# Altium PCB MY_AVR.PcbDoc
Units mm, origin at the board's own origin, x right, y up, seen from the top; angles counter-clockwise.
Board outline 35.7 x 43.97 mm, 2 copper layers (Top Layer, Bottom Layer); 31 components, 27 nets, 162 pads, 47 vias.
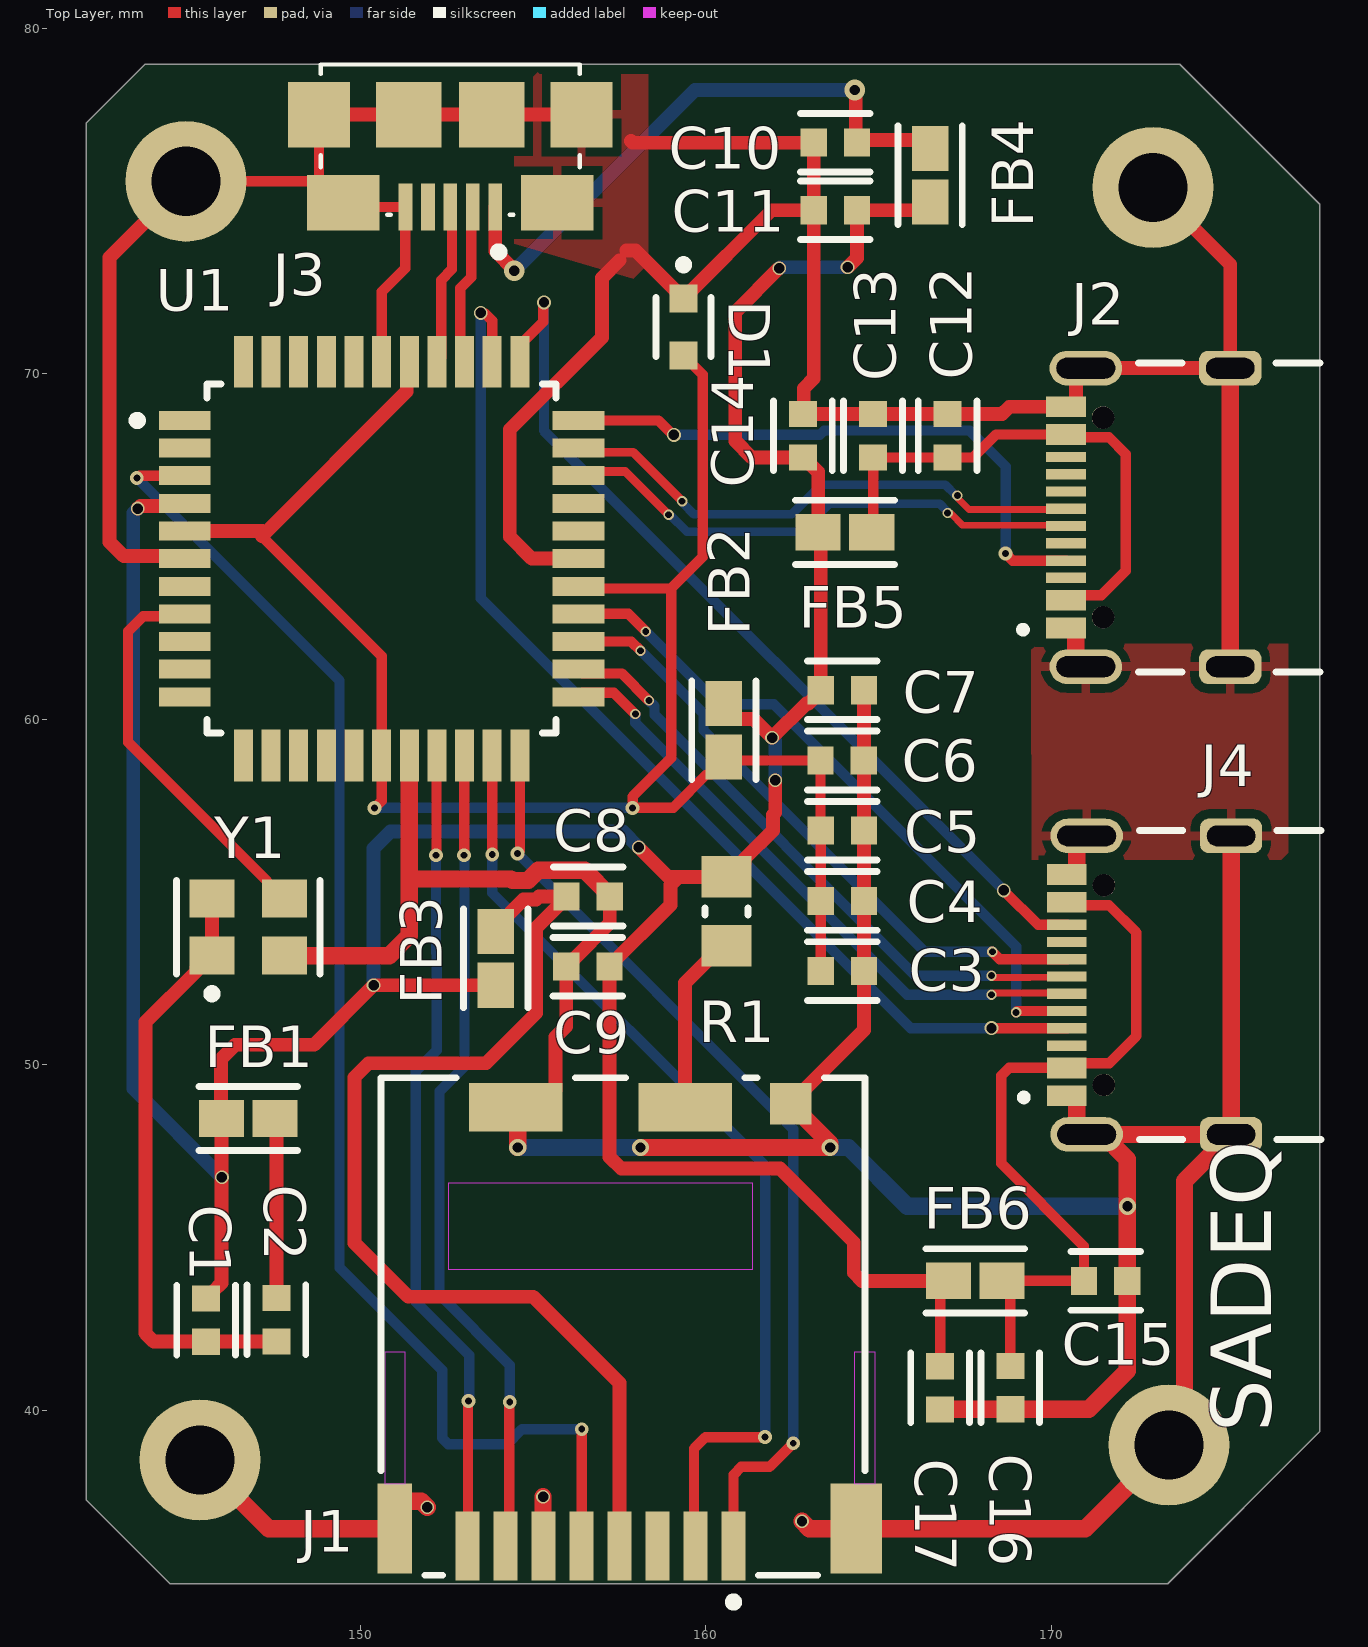
[diagram p0: Top Layer view]
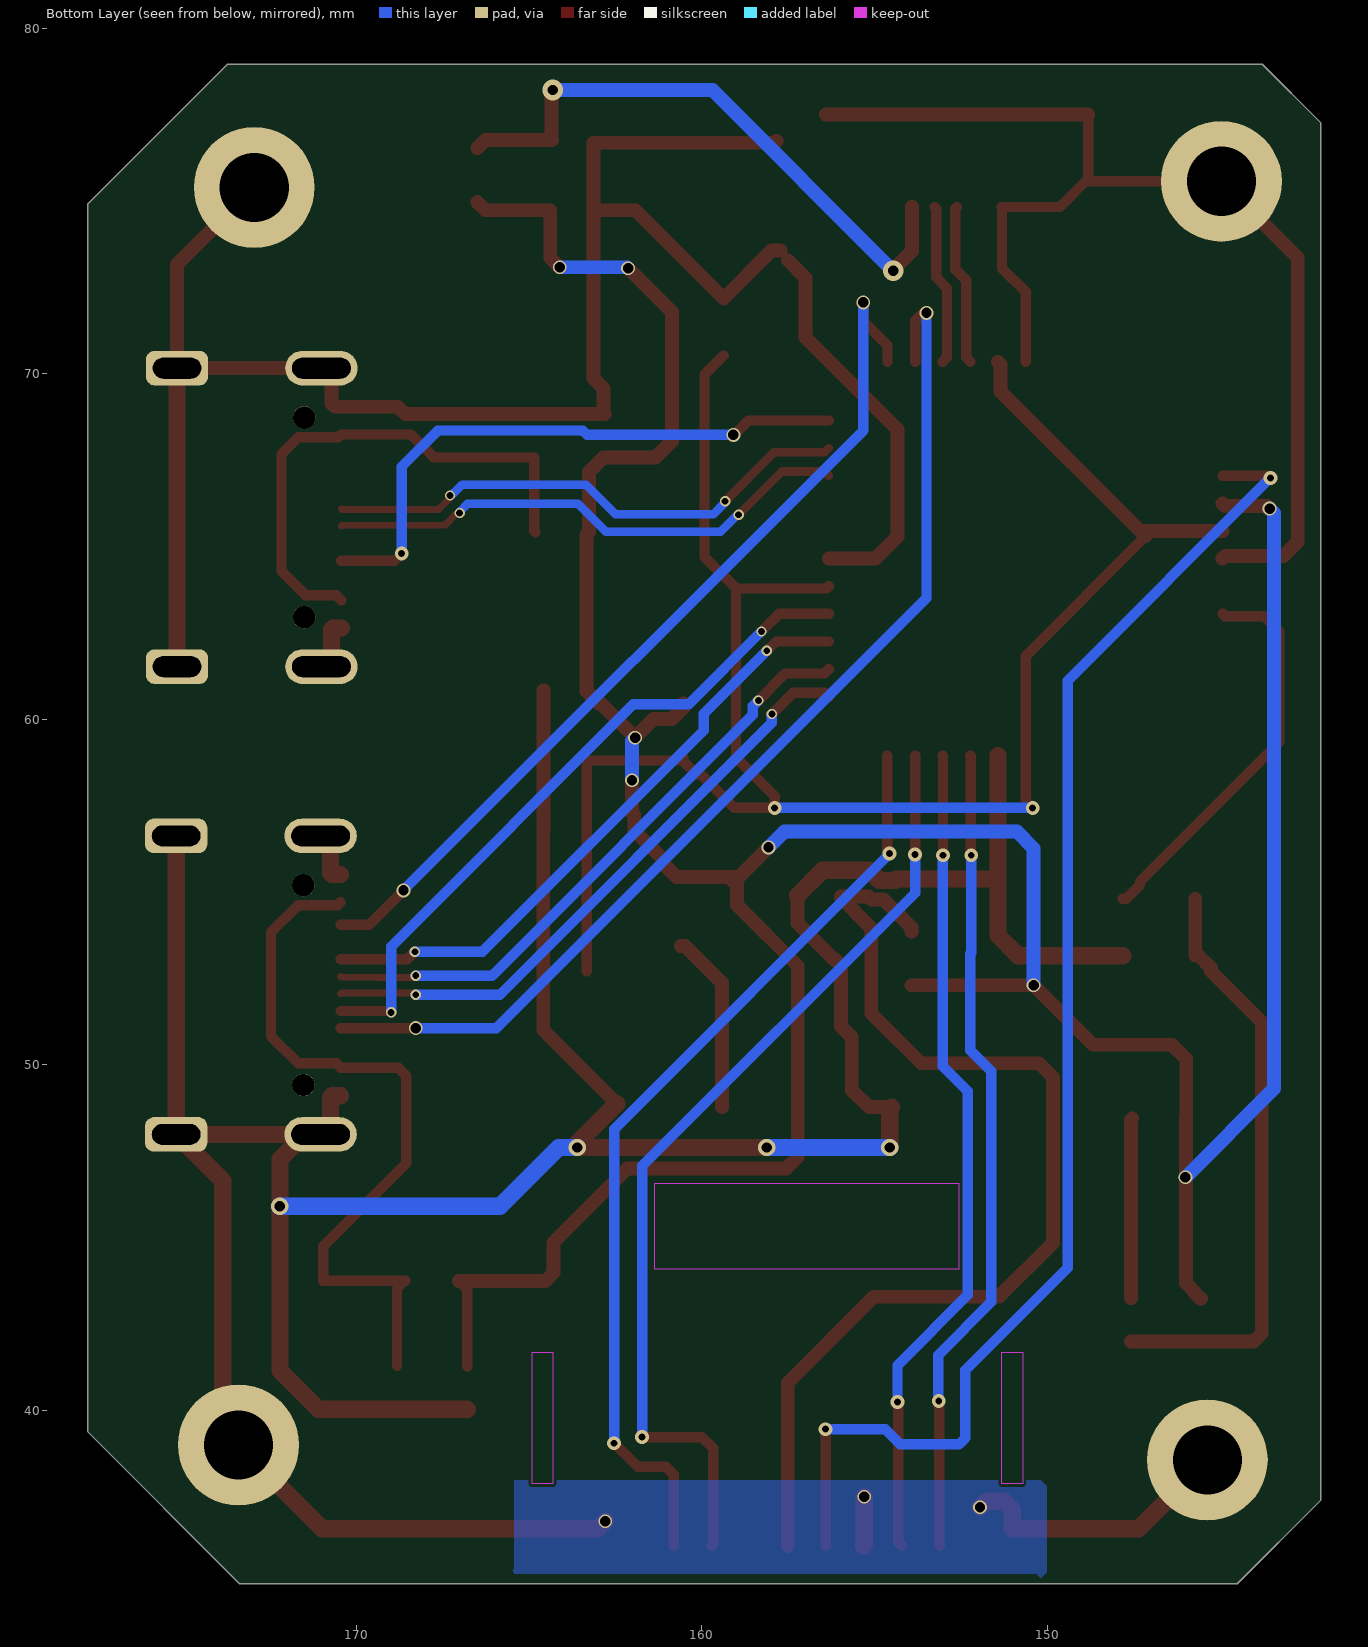
[diagram p1: Bottom Layer view, seen from below]
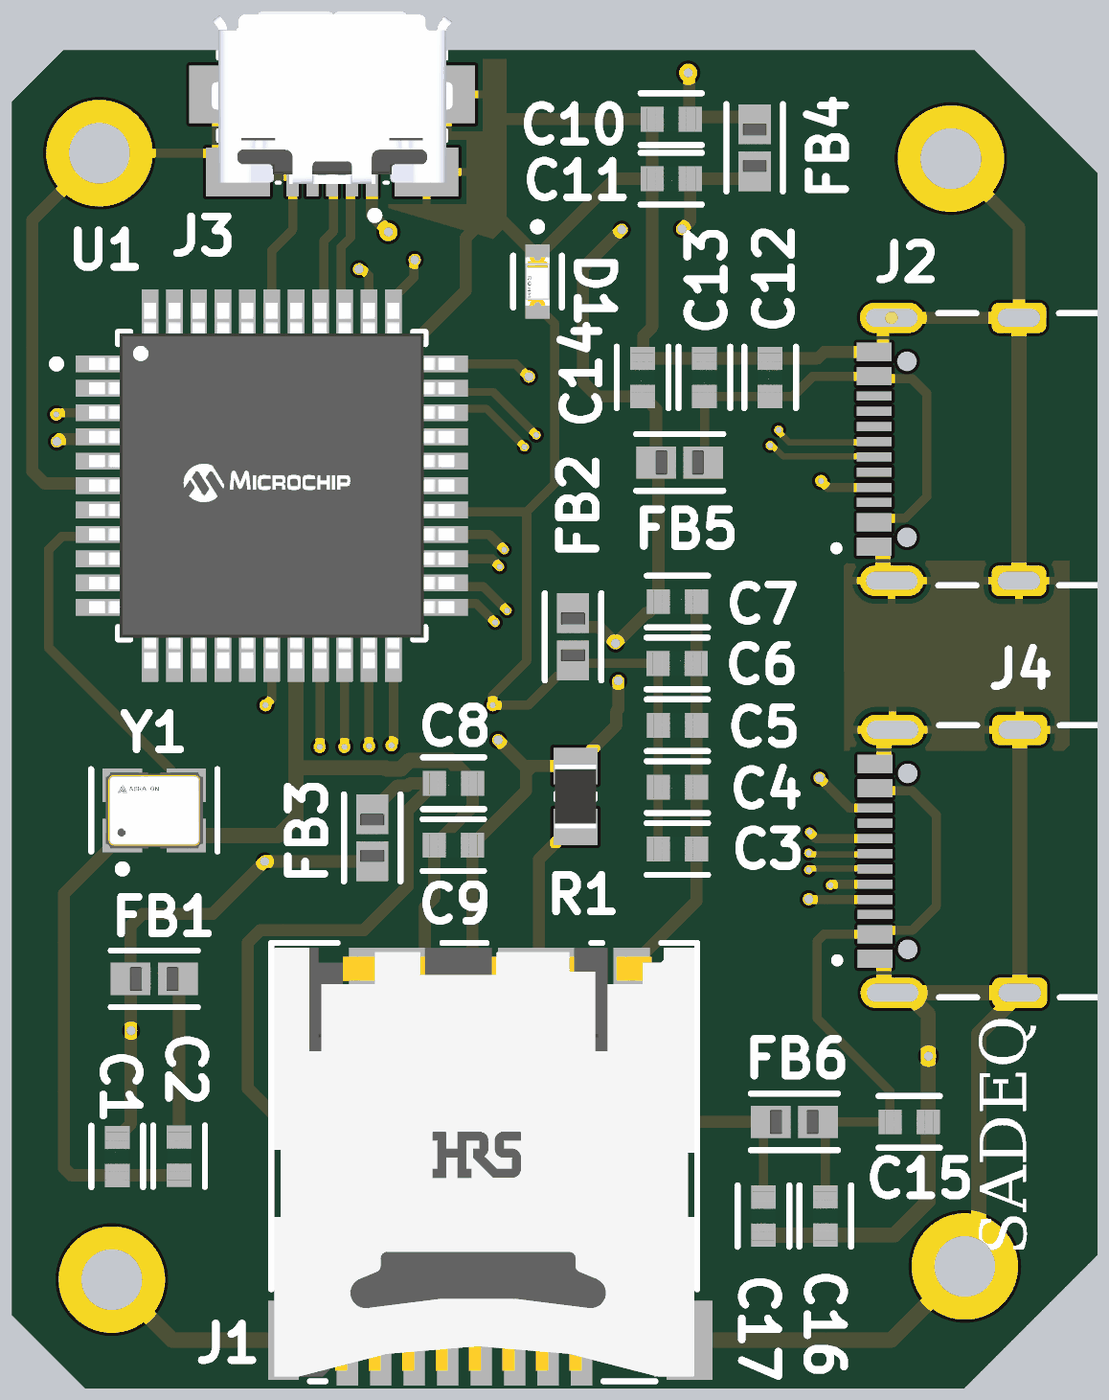
[diagram p2: 3D render of the assembled board from above, using the file's embedded part models]

## Layer stack, top to bottom
Top Solder: solder mask 0.0102, Solder Resist, Dk 3.5
Top Layer: signal copper 0.0356
Dielectric 1: dielectric 0.32, FR-4, Dk 4.8
Bottom Layer: signal copper 0.0356
Bottom Solder: solder mask 0.0102, Solder Resist, Dk 3.5

## Board outline
142.075,37.4 142.075,77.25 143.775,78.95 173.725,78.95 177.775,74.9 177.775,39.375 173.375,34.975 144.5,34.975

## Design rules (kind name [scope] priority, off if disabled: settings)
Clearance [All] p1: gap=0.1 ignorepadtopadclearanceinfootprint=TRUE except(0: Arc-Hole Track-Hole SMDPad-Hole THPad-Hole Via-Hole Fill-Hole Poly-Hole Region-Hole Text-Hole)
DiffPairsRouting [All] p1: maxlimit=0.254 minlimit=0.254 mostfreqgap=0.254 toplayer_minwidth=0.2 toplayer_maxwidth=0.4 toplayer_prefwidth=0.381 bottomlayer_minwidth=0.2 bottomlayer_maxwidth=0.4 bottomlayer_prefwidth=0.381 maxuncoupledlength=12.7
PolygonConnect [All] p1: connectstyle=Relief reliefconductorwidth=0.254 reliefentries=4 polygonreliefangle="90 Angle" airgapwidth=0.254
RoutingVias [All] p1: holewidth=0.3 width=0.6 viastyle="Through Hole" minholewidth=0.2 minwidth=0.3 maxholewidth=0.8 maxwidth=0.8
SolderMaskExpansion [All] p1: expansion=0.102 istentingtop=FALSE
Width [All] p1: maxlimit=0.5 minlimit=0.2 preferedwidth=0.3 minimp=50.000000 maximp=50.000000 favimp=50.000000
29 further rules are at their usual default settings.

## Classes and differential pairs
net class diff3: 3_N
component class MY_AVR: C1 C2 C3 C4 C5 C6 C7 C8 C9 D1 FB1 FB2 FB3 J1 R1 U1 Y1
component class CONNECTORS: C10 C11 C12 C13 C14 C15 C16 C17 FB4 FB5 FB6 J2 J3 J4
differential pair 3: +3_P -3_N
differential pair 1: +1_P -1_N
differential pair 0: +0_P -0_N

## Components (designator, comment, footprint, x,y, rotation, side; value= is the part's Value field where it differs from the comment)
C1 "100n" FP-CL10-IPC_C 145.543,42.605 r270 top
C2 "100n" FP-CL10-IPC_C 147.575,42.613 r270 top
C3 "100n" FP-CL10-IPC_C 163.957,52.705 r0 top
C4 "100n" FP-CL10-IPC_C 163.957,54.737 r0 top
C5 "100n" FP-CL10-IPC_C 163.957,56.769 r0 top
C6 "100n" FP-CL10-IPC_C 163.949,58.801 r0 top
C7 "100n" FP-CL10-IPC_C 163.957,60.833 r0 top
C8 "100n" FP-CL10-IPC_C 156.599,54.864 r0 top
C9 "100n" FP-CL10-IPC_C 156.591,52.832 r180 top
C10 "100n" FP-CL10-IPC_C 163.754,76.683 r180 top
C11 "100n" FP-CL10-IPC_C 163.754,74.727 r180 top
C12 "100n" FP-CL10-IPC_C 167.005,68.199 r90 top
C13 "100n" FP-CL10-IPC_C 164.846,68.199 r90 top
C14 "100n" FP-CL10-IPC_C 162.814,68.199 r90 top
C15 "100n" FP-CL10-IPC_C 171.577,43.739 r0 top
C16 "100n" FP-CL10-IPC_C 168.819,40.651 r270 top
C17 "100n" FP-CL10-IPC_C 166.787,40.643 r270 top
D1 "SMLE13WBC8W1" FP-SMLE13WBC8W1-MFG 159.36,71.349 r270 top
FB1 "BLM18KG121TN1D" FP-BLM18-0_15-t0_6-d1_2-IPC_A 146.761,48.438 r0 top
FB2 "BLM18KG121TN1D" FP-BLM18-0_15-t0_6-d1_2-IPC_A 160.528,59.676 r270 top
FB3 "BLM18KG121TN1D" FP-BLM18-0_15-t0_6-d1_2-IPC_A 153.924,53.072 r90 top
FB4 "BLM18KG121TN1D" FP-BLM18-0_15-t0_6-d1_2-IPC_A 166.497,75.743 r90 top
FB5 "BLM18KG121TN1D" FP-BLM18-0_15-t0_6-d1_2-IPC_A 164.033,65.405 r0 top
FB6 "BLM18KG121TN1D" FP-BLM18-0_15-t0_6-d1_2-IPC_A 167.804,43.739 r0 top
J1 "DM3CS-SF" FP-DM3CS-SF-MFG 157.607,42.418 r0 top
J2 "USB4105GFA060" GCT_USB4105GFA060#1 175.184,65.837 r90 top
J3 "10118192-0001LF" AMPHENOL_10118192-0001LF 152.609,74.82 r180 top
J4 "USB4105GFA060" GCT_USB4105GFA060#2 175.209,52.299 r90 top
R1 "1k" RESC2013X60X35ML10T20 160.604,54.432 r270 top
U1 "ATMEGA16A-AUR" FP-44A-MFG 150.622,64.643 r0 top
Y1 "ASE-24.000MHZ-LR-T" FP-ASE-MFG 146.761,53.975 r0 top

## Footprints (in the part's own frame and the unit in brackets; to place one, negate y for a bottom-side part, rotate by r counter-clockwise, add the part's x,y. Pads: shape width x height; smd on the part's side, far side on the other; paste and mask are expansions set on the pad)
AMPHENOL_10118192-0001LF [mm]
  rect 0.4x1.35 smd: 1(-1.3,0) 2(-0.65,0) 3(0,0) 4(0.65,0) 5(1.3,0)
  rect 2.1x1.6 smd: SH1(-3.1,-0.125) SH2(3.1,-0.125)
  rect 1.8x1.9 smd: SH3(-3.8,-2.675) SH6(3.8,-2.675)
  rect 1.9x1.9 smd: SH4(-1.2,-2.675) SH5(1.2,-2.675)
  silkscreen extent -3.75,-4.13 3.75,1.4, body extent -3.96,-5.4 3.96,0.27, height 2.5
FP-44A-MFG [mm]
  rect 1.5x0.55 smd paste+0 mask+0: 1(-5.7,4) 2(-5.7,3.2) 3(-5.7,2.4) 4(-5.7,1.6) 5(-5.7,0.8) 6(-5.7,0) 7(-5.7,-0.8) 8(-5.7,-1.6) 9(-5.7,-2.4) 10(-5.7,-3.2) 11(-5.7,-4) 23(5.7,-4) 24(5.7,-3.2) 25(5.7,-2.4) 26(5.7,-1.6) 27(5.7,-0.8) 28(5.7,0) 29(5.7,0.8) 30(5.7,1.6) 31(5.7,2.4) 32(5.7,3.2) 33(5.7,4)
  rect 0.55x1.5 smd paste+0 mask+0: 12(-4,-5.7) 13(-3.2,-5.7) 14(-2.4,-5.7) 15(-1.6,-5.7) 16(-0.8,-5.7) 17(0,-5.7) 18(0.8,-5.7) 19(1.6,-5.7) 20(2.4,-5.7) 21(3.2,-5.7) 22(4,-5.7) 34(4,5.7) 35(3.2,5.7) 36(2.4,5.7) 37(1.6,5.7) 38(0.8,5.7) 39(0,5.7) 40(-0.8,5.7) 41(-1.6,5.7) 42(-2.4,5.7) 43(-3.2,5.7) 44(-4,5.7)
  silkscreen extent -7.2,-5.05 5.05,5.05, body extent -6.55,-6.55 6.55,6.55, height 0.25
FP-ASE-MFG [mm]
  rect 1.3x1.1 smd paste+0 mask+0: 1(-1.05,-0.825) 2(1.05,-0.825) 3(1.05,0.825) 4(-1.05,0.825)
  silkscreen extent -2.07,-2.05 2.07,1.35, body extent -1.8,-1.48 1.8,1.48, height 0.25
FP-BLM18-0_15-t0_6-d1_2-IPC_A [mm]
  rect 1.306x1.058 smd paste+0 mask+0: 1(-0.776,0) 2(0.776,0)
  silkscreen extent -1.43,-0.93 1.43,0.93, body extent -1.93,-1.03 1.93,1.03, height 0.25
FP-CL10-IPC_C [mm]
  rect 0.758x0.812 smd paste+0 mask+0: 1(-0.627,0) 2(0.627,0)
  silkscreen extent -1.01,-0.85 1.01,0.85, body extent -1.11,-0.55 1.11,0.55, height 0.25
FP-DM3CS-SF-MFG [mm]
  rect 0.7x2 smd paste+0 mask+0: 1(3.2,-6.35) 2(2.1,-6.35) 3(1,-6.35) 4(-0.1,-6.35) 5(-1.2,-6.35) 6(-2.3,-6.35) 7(-3.4,-6.35) 8(-4.5,-6.35)
  rect 2.7x1.4 smd paste+0 mask+0: 9(-3.1,6.35) 10(1.8,6.35)
  rect 1.2x1.2 smd paste+0 mask+0: 11(4.85,6.45)
  rect 1x2.6 smd paste+0 mask+0: 12(-6.6,-5.85)
  rect 1.5x2.6 smd paste+0 mask+0: 13(6.75,-5.85)
  Keep-Out Layer region: -5.05,1.65 3.75,1.65 3.75,4.15 -5.05,4.15
  Keep-Out Layer region: 6.7,-4.55 7.3,-4.55 7.3,-0.75 6.7,-0.75
  Keep-Out Layer region: -6.9,-4.55 -6.3,-4.55 -6.3,-0.75 -6.9,-0.75
  silkscreen extent -7,-8.1 7,7.2, body extent -7.2,-7.45 7.6,7.3, height 0.25
FP-SMLE13WBC8W1-MFG [mm]
  rect 0.8x0.8 smd paste+0 mask+0: 1(-0.825,0) 2(0.825,0)
  silkscreen extent -1.92,-0.8 0.85,0.8, body extent -1.33,-0.55 1.33,0.55, height 0.25
GCT_USB4105GFA060#1 [mm]
  rect 0.6x1.15 smd: A1_B12(-3.2,4.755) A4_B9(-2.4,4.755) B1_A12(3.2,4.755) B4_A9(2.4,4.755)
  rect 0.3x1.15 smd: A5(-1.25,4.755) A7(0.25,4.755) A8(1.25,4.755) B5(1.75,4.755) B6(0.75,4.755) B7(-0.75,4.755) B8(-1.75,4.755)
  rect 0.3x1.15 smd mask+0.102: A6(-0.25,4.755)
  oval 1x2.1 hole 0.6 slot 1.7 at 90 deg: SH1(-4.32,4.18) SH2(4.32,4.18)
  rrect50% 1x1.8 hole 0.6 slot 1.4 at 90 deg: SH3(-4.32,0) SH4(4.32,0)
  round 0.65 hole 0.65 unplated: ""(-2.89,3.68) ""(2.89,3.68)
  silkscreen extent -4.47,-2.6 4.47,6.1
GCT_USB4105GFA060#2 [mm]
  rect 0.6x1.15 smd: A1_B12(-3.2,4.755) A4_B9(-2.4,4.755) B1_A12(3.2,4.755) B4_A9(2.4,4.755)
  rect 0.3x1.15 smd: A5(-1.25,4.755) A6(-0.25,4.755) A7(0.25,4.755) A8(1.25,4.755) B5(1.75,4.755) B6(0.75,4.755) B7(-0.75,4.755) B8(-1.75,4.755)
  oval 1x2.1 hole 0.6 slot 1.7 at 90 deg: SH1(-4.32,4.18) SH2(4.32,4.18)
  rrect50% 1x1.8 hole 0.6 slot 1.4 at 90 deg: SH3(-4.32,0) SH4(4.32,0)
  round 0.65 hole 0.65 unplated: ""(-2.89,3.68) ""(2.89,3.68)
  silkscreen extent -4.47,-2.6 4.47,6.1
RESC2013X60X35ML10T20 [mm] "Chip Resistor, 2-Leads, Body 2.1x1.35mm, IPC Low Density"
  rect 1.2x1.45 smd: 1(-1,0) 2(1,0)
  silkscreen extent -0.1,-0.63 0.1,0.63, body extent -1.05,-0.68 1.05,0.67, height 0.6

## Part data
C1 C2 C3 C4 C5 C6 C7 C8 C9 C10 C11 C12 C13 C14 C15 C16 C17: library part CMP-13271-003017-1, "Cap Ceramic 4.7uF 10V X5R ±10% Pad SMD 0603 +85°C T/R", Capacitance=4.7uF, Case Code (Imperial)=0603, Case Code (Metric)=1608, Dielectric=X5R, Max Operating Temperature=85°C, Min Operating Temperature=-55°C, Package Quantity=1, Tolerance=10%, Voltage Rating=10V, Case/Package=0603, Contact Plating=Tin, Depth=0.8mm, Height=0.8mm, Length=1.6mm, Mount="Surface Mount", Packaging="Tape and Reel", Radiation Hardening=No, Thickness=0.035inch, Width=0.031inch
D1: library part CMP-08952-000004-1, "LED WHITE 0603 SMD", Colour=White, Forward Current=5mA, Forward Voltage=2.9V, Manufacturer=Rohm, Package=0, Power Dissipation=66mW, Reverse Voltage=5V, Temperature="-40°C to +85°C", Temperature Range High=+85°C, Temperature Range Low=-40°C, Automotive=No, Category=Diode, ComponentLink2Description=Datasheet, ComponentLink2URL=https://media.digikey.com/pdf/Data%20Sheets/Rohm%20PDFs/SMLE13WBC8W1_Spec.pdf, Device Class L1=Optoelectronics, Device Class L2=LEDs, Device Class L3=unset, Digikey Description="LED WHITE 0603 SMD", Height=0.4mm, Lead Free=Yes, Led Orientation="Top View", Luminous Intensity=140mcd, Manufacturer Part Number=SMLE13WBC8W1, Mouser Description="Standard LEDs - SMD ExceLED White LED 120mcd 5mA", Octopart=https://octopart.com/smle13wbc8w1-rohm-22224565, RoHS=TRUE
FB1 FB2 FB3 FB4 FB5 FB6: library part CMP-0686-00554-8, "FERRITE BEAD 120 OHM 0603 1LN", Case Code (Imperial)=0603, Case Code (Metric)=1608, Current Rating=3A, DC Resistance (DCR)=30mR, Inductor Type="FERRITE BEAD", Max Operating Temperature=125°C, Min Operating Temperature=-55°C, Package Quantity=4000, Test Frequency=100MHz, Tolerance=25%, Case/Package=0603, Core Material=Ferrite, Depth=0.95mm, Height=0.8mm, Impedance=120R, Lead Free="Lead Free", Length=1.6mm, Material=Ferrite, Max Current Rating=3A, Max DC Current=3A, Number of Circuits=1, Number of Lines=1, Number of Pins=2, Packaging="Tape and Reel", REACH SVHC="No SVHC", RoHS Compliant=Yes, Series=BLM18K, Termination=SMD/SMT, Width=0.8mm
J1: library part CMP-11597-000003-1, "CONN MICRO SD CARD HINGED TYPE", Contact Resistance=100mR, Current Rating=500mA, Flammability Rating="UL94 V-0", Insulation Resistance=1GR, Max Operating Temperature=85°C, Min Operating Temperature=-25°C, Package Quantity=1, Voltage Rating (AC)=125V, Connector Type=Connector, Contact Material=Gold, Contact Plating=Gold, Depth=1.83mm, Gender=Female, Housing Material=Polymer, Lead Free="Lead Free", Length=14.1mm, Max Current Rating=500mA, Mount="Surface Mount", Number of Contacts=8, Number of Positions=8, Number of Rows=1, Orientation="Right Angle", Packaging="Tape and Reel", Pitch=1.1mm, Radiation Hardening=No, Termination=Solder, Width=13.8mm
J2 J4: Package=None, Availability=Unavailable, MF="{'manufacturer': u'GCT'}", MP=USB4105GFA060, Price=None
J3: "Micro USB, Input Output Connectors, B TYPE RECEPTACLE with flange", Package=None, Availability="In Stock", Check_prices=https://www.snapeda.com/parts/10118192-0001LF/Amphenol+FCI/view-part/?ref=eda, MF="Amphenol ICC", MP=10118192-0001LF, Price=None, Purchase-URL=https://pricing.snapeda.com/search/part/10118192-0001LF/?ref=eda, SnapEDA_Link=https://www.snapeda.com/parts/10118192-0001LF/Amphenol+FCI/view-part/?ref=snap
R1: library part CMP-2100-03673-1, "Chip Resistor, 0 Ohm, Jumper, +/- 5%, 0.125 W, -55 to 155 degC, 0805 (2012 Metric), RoHS, Tape and Reel", Case Code (Imperial)=0805, Case Code (Metric)=2012, Manufacturer=Yageo, Max Operating Temperature=155degC, Min Operating Temperature=-55degC, Package Description="2-Pin Surface Mounted Device, Body 2 x 1.25 mm", Power Rating=125mW, Resistance=0mOhm, Temperature Coefficient=200ppm/degreesC, Tolerance=5%, Voltage Rating=150V, Case/Package=0805, Composition=ThickFilm, Contact Plating=Tin, Datasheet URL=http://www.yageo.com/NewPortal/yageodocoutput?fileName=/pdf/R-Chip/PYu-RC_Group_51_RoHS_L_5.pdf, Datasheet Version="Rev. 5, 10/2016", Depth=1.25mm, Height=0.5mm, Lead Free=LeadFree, Length=2mm, Manufacturer URL=http://www.yageo.com/, Military Standard=Not, Number of Pins=2, Package Reference=0805, Packaging=TapeandReel, Radiation Hardening=No, REACH SVHC=Unknown, RoHSCompliant=true, Termination=SMD/SMT, Voltage Rating (DC)=150V, Width=1.25mm
U1: library part CMP-06276-000100-1, "IC MCU 8BIT 16KB FLASH 44TQFP", Case/Package=DIP, Frequency=4MHz, Max Operating Temperature=70°C, Min Operating Temperature=0°C, Core Architecture=PIC, Memory Size=896B, Memory Type=OTP, Number of I/Os=13, Oscillator Type=External, Packaging=Rail/Tube, Peripherals="Brown-out Detect/Reset", RoHS Compliant=Yes, Series="PIC® 16C"
Y1: library part CMP-27762-001392-1, "XTAL Oscillator 24MHz ±25ppm CMOS 3.3V 4-SMD 3.2mm x 2.5mm", Case/Package=SMD/SMT, Frequency=24MHz, Frequency Stability=25ppm, Load Capacitance=15pF, Max Operating Temperature=85°C, Max Supply Current=13mA, Min Operating Temperature=-40°C, Operating Supply Voltage=3.3V, Package Quantity=1000, Height=0.047inch, Lead Free="Lead Free", Length=0.126inch, Mount="Surface Mount", Number of Pins=4, Packaging="Tape and Reel", Series=ASE, Width=0.098inch

## Free pads (board coordinates)
  round 3.5 hole 2: 2(144.958,75.565) 2(145.364,38.557) 2(172.949,75.387) 2(173.406,38.989)

## Via types
v1: diameter 0.4, hole 0.3, Top Layer to Bottom Layer, 16 vias
v2: diameter 0.4, hole 0.2, Top Layer to Bottom Layer, 13 vias
v3: diameter 0.3, hole 0.2, Top Layer to Bottom Layer, 12 vias
v4: diameter 0.5, hole 0.3, Top Layer to Bottom Layer, 4 vias
v5: diameter 0.6, hole 0.3, Top Layer to Bottom Layer, 2 vias

## Nets (pads, with @x,y where several pads share a name; then routed paths per layer and width w, separated by ;. In a path a pad name is that pad's centre, name@x,y a point inside that pad or via, vN(x,y) a via of type N, cw(c..) or ccw(c..) an arc to the next point about the centre after c; other vN are vias at no path point)
0_N: J3.2 U1.36 | length 4.7
  Top Layer w0.3: U1.36 152.899,70.466 152.899,72.473 153.211,72.785 153.211,74.772 J3.2
0_P: J3.3 U1.37 | length 4.7
  Top Layer w0.3: U1.37 152.345,70.466 152.345,72.702 152.657,73.015 152.657,74.772 J3.3
1_N: J4.A7 U1.24 | length 18
  Top Layer w0.2: v3(168.275,52.573) 168.302,52.573 168.352,52.523 169.391,52.523 169.393,52.526 170.431,52.526 J4.A7
  Top Layer w0.3: U1.24 156.445,61.32 157.576,61.32 v3(158.359,60.537)
  Bottom Layer w0.3: v3(158.359,60.537) 158.521,60.374 158.521,60.118 166.066,52.573 v3(168.275,52.573)
1_P: J4.A6 U1.23 | length 18
  Top Layer w0.2: v3(168.275,52.019) 168.302,52.019 168.352,52.069 169.579,52.069 169.581,52.072 170.431,52.072 J4.A6
  Top Layer w0.3: U1.23 156.445,60.766 157.346,60.766 v3(157.967,60.145)
  Bottom Layer w0.3: v3(157.967,60.145) 157.967,59.888 165.837,52.019 v3(168.275,52.019)
2_N: J4.B7 U1.26 | length 20
  Top Layer w0.3: U1.26 157.759,63.043 v3(158.267,62.535) ; v3(168.986,51.511) 169.024,51.549 J4.B7
  Bottom Layer w0.3: v3(158.267,62.535) 160.376,60.427 161.976,60.427 168.986,53.416 v3(168.986,51.511)
2_P: J4.B6 U1.25 | length 18.2
  Top Layer w0.3: U1.25 157.848,62.243 v3(158.115,61.976) ; v3(168.3,53.264) 168.516,53.049 J4.B6
  Bottom Layer w0.3: v3(158.115,61.976) 159.94,60.151 159.94,59.669 166.345,53.264 v3(168.3,53.264)
3_N: J2.A7 U1.32 | length 15.6
  Top Layer w0.2: v3(167.284,66.472) 167.304,66.453 167.304,66.381 167.621,66.064 170.406,66.064 J2.A7
  Top Layer w0.25: U1.32 156.445,67.72 157.904,67.72 v3(159.32,66.305)
  Bottom Layer w0.25: v3(159.32,66.305) 159.345,66.28 159.345,66.244 159.659,65.93 162.495,65.93 163.349,66.784 166.934,66.784 167.234,66.484 v3@167.272,66.484
3_P: J2.A6 U1.31 | length 15.5
  Top Layer w0.2: v3(167.005,65.964) 167.024,65.945 167.098,65.945 167.433,65.61 170.406,65.61 J2.A6
  Top Layer w0.25: U1.31 156.445,67.166 157.675,67.166 158.903,65.938 v3(158.928,65.913)
  Bottom Layer w0.25: v3(158.928,65.913) 158.963,65.913 159.45,65.426 162.774,65.426 163.579,66.23 166.775,66.23 166.98,66.025 166.98,65.993 v3@167.007,65.966
3V3: C1.1 C7.1 C9.1 C11.1 C14.1 C17.1 FB1.1 FB2.1 FB3.1 FB4.1 FB5.1 FB6.1 R1.1 U1.4 | length 105.3
  Top Layer w0.3: C17.1 166.787,43.498 FB6.1
  Top Layer w0.4: v1(143.561,66.091) 143.638,66.168 144.847,66.168 U1.4 ; C1.1 145.57,43.232 145.749,43.411 145.749,43.438 145.985,43.674 FB1.1 145.974,48.449 145.974,50.165 146.38,50.571 148.666,50.571 v1(150.391,52.296) FB3.1 ; v1(158.064,56.286) 158.918,55.432 159.213,55.432 ; FB2.1 160.528,60.328 160.857,59.999 161.387,59.999 v1(161.925,59.461) 162.916,60.452 162.976,60.452 163.33,60.806 163.33,65.332 FB5.1 163.257,67.156 162.841,67.572 C14.1 161.333,67.572 160.858,68.047 160.858,71.78 v1(162.128,73.05) ; v1(162.015,58.23) 162.015,57.294 161.95,57.23 161.95,56.778 161.129,55.957 161.129,55.832 160.729,55.432 R1.1 159.213,55.432 ; v1(164.109,73.076) 164.381,73.347 C11.1 166.257,74.727 FB4.1 ; FB6.1 164.522,43.739 164.287,43.973 164.287,44.856 162.154,46.99 157.556,46.99 157.218,47.328 C9.1 157.218,52.859 158.979,54.62 158.979,55.198 159.213,55.432
  Bottom Layer w0.4: v1(143.561,66.091) 143.434,65.964 143.434,49.301 v1(145.999,46.736) ; v1(150.391,52.296) 150.391,56.258 150.876,56.744 157.607,56.744 v1(158.064,56.286) ; v1(161.925,59.461) 162.015,59.372 v1(162.015,58.23) ; v1(162.128,73.05) 162.154,73.076 v1(164.109,73.076)
GND: C3.2 C4.2 C5.2 C6.2 C7.2 C8.2 C9.2 C10.2 C11.2 C12.2 C13.2 C14.2 C15.2 C16.2 C17.2 D1.1 J1.6 J1.9 J1.11 J1.12 J1.13 J2.A1_B12 J2.B1_A12 J2.SH1 J2.SH2 J2.SH3 J2.SH4 J3.5 J3.SH1 J3.SH2 J3.SH3 J3.SH4 J3.SH5 J3.SH6 J4.A1_B12 J4.B1_A12 J4.SH1 J4.SH2 J4.SH3 J4.SH4 pad.2 U1.6 U1.18 U1.28 U1.39 Y1.2 | length 213.3
  Top Layer w0.3: pad.2@144.958,75.565 J3.SH2@148.84,75.565 ; J3.SH6 148.809,75.595 J3.SH2@148.84,75.565 ; U1.39 150.622,72.365 151.308,73.05 151.308,74.819 J3.5 149.634,74.82 J3.SH2 148.89,75.565 J3.SH2@148.84,75.565
  Top Layer w0.4: U1.6 144.847,64.718 143.156,64.718 142.748,65.126 142.748,73.355 pad.2@144.958,75.565 ; J3.SH6 J3.SH5 J3.SH4 J3.SH3 ; J1.9 155.157,48.768 155.657,49.268 155.657,50.793 155.964,51.1 155.964,52.859 156.143,53.038 156.17,53.038 157.224,54.092 C8.2@157.224,54.862 ; U1.28 154.965,64.643 154.33,65.278 154.33,68.377 156.997,71.044 156.997,72.771 157.505,73.279 ; 157.709,73.558 157.975,73.558 D1.1 161.913,74.727 C11.2 C10.2 157.886,76.683 157.836,76.733 ; J1.11 164.584,50.995 C3.2 C4.2 C5.2 164.58,56.773 164.58,58.797 C6.2 164.58,58.805 164.58,60.829 C7.2 ; C11.2@163.127,74.7 163.127,69.857 162.84,69.571 162.84,68.852 C14.2 C13.2 C12.2 168.577,68.826 168.788,69.037 J2.B1_A12 170.616,69.037 170.716,69.137 170.716,69.88 170.993,70.157 J2.SH2 J2.SH4 175.184,73.152 pad.2@172.949,75.387
  Top Layer w0.5: pad.2@145.364,38.557 147.353,36.568 J1.12 151.007,37.113 151.257,37.363 151.765,37.363 v1(151.943,37.186) ; Y1.2 150.838,53.15 151.422,53.734 151.422,55.372 ; U1.18 151.422,55.372 ; J1.9 154.559,48.716 v4(154.559,47.6) ; v1(155.296,37.49) 155.296,36.079 J1.6 ; C8.2@157.224,54.862 157.224,54.893 156.497,55.62 155.153,55.62 154.863,55.33 154.407,55.33 154.365,55.372 151.422,55.372 ; v4(158.115,47.6) v4(163.601,47.6) 163.601,47.724 J1.11 ; v1(162.789,36.779) 163,36.568 J1.13 170.985,36.568 173.863,39.446 173.863,46.632 J4.SH3 ; C17.2 166.791,40.02 168.815,40.02 C16.2 171.088,40.024 172.204,41.14 C15.2 172.204,47.26 J4.SH1@171.485,47.979 ; J2.A1_B12 170.666,62.637 170.716,62.587 170.716,61.748 170.947,61.517 J2.SH1 ; J4.A1_B12 170.692,49.099 170.742,49.049 170.742,48.21 170.973,47.979 J4.SH1 J4.SH1@171.485,47.979 ; J4.B1_A12 170.692,55.499 170.742,55.549 170.742,56.388 170.973,56.619 J4.SH2 ; J2.SH3 J2.SH4 ; J4.SH4 J4.SH3 ; J4.SH1@171.485,47.979 J4.SH3
  Bottom Layer w0.5: v4(154.559,47.6) v4(158.115,47.6) ; v4(163.601,47.6) 164.135,47.6 165.837,45.898 v4(172.212,45.898)
MICCLK: J1.5 U1.3 | length 40.5
  Top Layer w0.3: v2(143.535,66.98) 143.562,66.98 143.622,67.039 144.918,67.039 U1.3 ; J1.5 156.41,36.071 156.41,39.443 v2(156.413,39.446)
  Bottom Layer w0.3: v2(143.535,66.98) 149.403,61.112 149.403,44.12 152.375,41.148 152.375,39.19 152.55,39.014 154.252,39.014 154.684,39.446 v2(156.413,39.446)
NetC1_2: C1.2 C2.2 Y1.1 Y1.4 | length 17.3
  Top Layer w0.4: Y1.4 Y1.1 145.611,53.15 145.261,52.8 145.261,52.7 143.789,51.228 143.789,42.221 144.024,41.986 145.535,41.986 C1.2 145.547,41.982 147.571,41.982 C2.2
NetC2_1: C2.1 FB1.2 | length 5.2
  Top Layer w0.4: FB1.2 147.575,48.4 C2.1
NetC3_1: C3.1 C4.1 C5.1 C6.1 D1.2 FB2.2 U1.5 U1.17 U1.27 U1.38 | length 55
  Top Layer w0.3: 147.155,65.443 147.155,65.291 150.622,61.824 U1.17 150.622,57.633 v2(150.419,57.429) ; U1.27 156.386,63.779 159.004,63.779 ; D1.2 159.918,69.965 159.918,64.694 159.004,63.779 ; FB2.2 160.528,58.776 160.149,58.397 160.025,58.397 159.058,57.429 v2(157.886,57.429) 157.886,57.76 159.004,58.877 159.004,63.779 ; FB2.2@160.627,58.801 C6.1 163.326,58.797 163.326,56.773 C5.1 C4.1 C3.1
  Top Layer w0.4: U1.5 147.155,65.443 ; 147.155,65.291 151.347,69.483 151.347,70.268 U1.38
  Bottom Layer w0.3: v2(150.419,57.429) v2(157.886,57.429)
NetC8_1: C8.1 FB3.2 J1.4 | length 31.2
  Top Layer w0.4: FB3.2 153.924,53.972 154.732,54.78 155.091,54.78 155.175,54.864 C8.1 155.972,54.837 155.092,53.957 155.092,51.486 153.645,50.038 150.241,50.038 149.835,49.632 149.835,44.837 151.39,43.282 155.006,43.282 157.507,40.781 J1.4
NetC10_1: C10.1 FB4.2 J3.1 | length 17.8
  Top Layer w0.4: J3.1 153.909,73.545 154.457,72.997 v5(154.457,72.974) ; v5(164.313,78.207) 164.347,78.173 164.347,76.774 164.33,76.757 166.259,76.757 FB4.2
  Bottom Layer w0.4: v5(154.457,72.974) 159.69,78.207 v5(164.313,78.207)
NetC12_1: C12.1 C13.1 FB5.2 J2.A4_B9 J2.B4_A9 | length 15.5
  Top Layer w0.3: FB5.2 164.846,65.442 C13.1 C12.1 167.75,67.572 168.414,68.237 J2.B4_A9 170.514,68.152 171.675,68.152 172.161,67.666 172.161,64.287 171.454,63.58 170.572,63.58 J2.A4_B9
NetC15_1: C15.1 C16.1 FB6.2 J4.A4_B9 J4.B4_A9 | length 21.6
  Top Layer w0.254: FB6.2 FB6.2@168.819,43.5
  Top Layer w0.3: FB6.2 C15.1 170.95,44.747 168.554,47.142 168.554,49.682 168.783,49.911 170.442,49.911 170.569,50.038 171.679,50.038 172.466,50.825 172.466,53.823 171.675,54.614 170.539,54.614 J4.B4_A9 ; C16.1 FB6.2@168.819,43.5
NetJ1_10: J1.10 R1.2 | length 5.2
  Top Layer w0.4: J1.10 159.407,52.36 160.479,53.432 R1.2
NetJ2_A5: J2.A5 U1.33 | length 17.4
  Top Layer w0.3: U1.33 158.635,68.643 159.053,68.224 v1(159.08,68.224) ; v2(168.681,64.795) 168.89,64.587 J2.A5
  Bottom Layer w0.3: v1(159.08,68.224) 163.31,68.224 163.437,68.351 167.64,68.351 168.681,67.31 v2(168.681,64.795)
NetJ4_A5: J4.A5 U1.35 | length 32
  Top Layer w0.3: v1(153.492,71.755) 153.511,71.736 153.619,71.736 153.822,71.533 U1.35 ; v1(168.275,51.054) 168.28,51.049 J4.A5
  Bottom Layer w0.3: v1(153.492,71.755) 153.492,63.5 165.938,51.054 v1(168.275,51.054)
NetJ4_B5: J4.B5 U1.34 | length 26.7
  Top Layer w0.3: U1.34 154.622,70.818 155.302,71.498 155.302,72.041 v1(155.321,72.06) ; v1@168.65,55.023 169.624,54.049 J4.B5
  Bottom Layer w0.3: v1(155.321,72.06) 155.321,68.351 v1(168.631,55.042)
NetU1_8: U1.8 Y1.3 | length 11.5
  Top Layer w0.3: U1.8 144.856,62.977 143.722,62.977 143.281,62.537 143.281,59.33 147.311,55.3 147.311,55.2 147.711,54.8 Y1.3
serial_data0: J1.8 U1.19 | length 23.8
  Top Layer w0.3: v2(152.197,56.058) 152.209,56.07 152.209,58.93 U1.19 ; J1.8 153.122,36.083 153.122,40.244 v2(153.137,40.259)
  Bottom Layer w0.3: v2(152.197,56.058) 152.197,53.238 152.222,53.212 152.222,50.419 151.613,49.809 151.613,43.129 153.156,41.586 153.156,40.278 v2(153.137,40.259)
serial_data1: J1.7 U1.20 | length 24.1
  Top Layer w0.3: v2(153.01,56.058) 153.016,56.064 153.016,58.937 U1.20 ; J1.7 154.311,36.172 154.311,40.214 v2(154.33,40.234)
  Bottom Layer w0.3: v2(153.01,56.058) 153.022,56.045 153.022,49.948 152.298,49.225 152.298,43.332 154.33,41.3 v2(154.33,40.234)
serial_data2: J1.2 U1.21 | length 28
  Top Layer w0.3: v2(153.822,56.083) U1.21 ; J1.2 159.664,36.111 159.664,38.887 159.995,39.218 v2(161.722,39.218)
  Bottom Layer w0.3: v2(153.822,56.083) 153.822,54.966 161.722,47.066 v2(161.722,39.218)
serial_data3: J1.1 U1.22 | length 27.4
  Top Layer w0.3: v2(154.559,56.109) 154.559,56.136 154.629,56.205 154.629,58.936 U1.22 ; J1.1 160.807,38.127 161.034,38.354 161.849,38.354 v2(162.535,39.04)
  Bottom Layer w0.3: v2(154.559,56.109) 162.535,48.133 v2(162.535,39.04)
pads on no net: J1.3 J2. J2.A8 J2.B5 J2.B6 J2.B7 J2.B8 J3.4 J4. J4.A8 J4.B8 U1.1 U1.2 U1.7 U1.9 U1.10 U1.11 U1.12 U1.13 U1.14 U1.15 U1.16 U1.29 U1.30 U1.40 U1.41 U1.42 U1.43 U1.44

## Polygon pours and split planes (outlines as drawn)
GND on Top Layer "GND_L01_P000" (solid, pour order 0): 169.418,62.052 169.545,62.179 176.86,62.179 176.86,56.134 176.657,55.931 169.443,55.931
GND on Top Layer "GND_L01_P001" (solid, pour order 1): 158.344,73.177 157.912,72.746 154.457,73.762 154.457,78.029 155.143,78.715 155.194,78.664 158.344,78.664
GND on Bottom Layer "GND_L02_P002" (solid, pour order 2): 150.012,35.306 150.19,35.128 150.317,35.255 165.583,35.255 165.43,35.408 165.43,37.973 150.19,37.973 150.012,37.795

## Silkscreen, mask and mechanical layers (free items; w line width, h text height)
Top Overlay:
  text "SADEQ" at 176.943,39.353 h3 r90
Mechanical 1:
  lines w0.254: 142.075,37.4 144.5,34.975 173.375,34.975 177.775,39.375 177.775,74.275 177.775,74.9 173.725,78.95 143.775,78.95 142.075,77.25 142.075,37.4

## Text inside footprints (layer, text, board x,y; h text height)
J2: Top 3D Body "PCB EDGE" at 177.684,71.237 h0.41 r90
J3: Top 3D Body "PCB Edge" at 147.404,78.724 h0.81 r180
J4: Top 3D Body "PCB EDGE" at 177.709,57.699 h0.41 r90